# Altium PCB 433MHz_LNA.PcbDoc
Units mm, origin at the board's own origin, x right, y up, seen from the top; angles counter-clockwise.
Board outline 48.2 x 27.4 mm, 2 copper layers (Top Layer, Bottom Layer), stack 0.671 mm thick; 58 components, 24 nets, 176 pads, 495 vias.
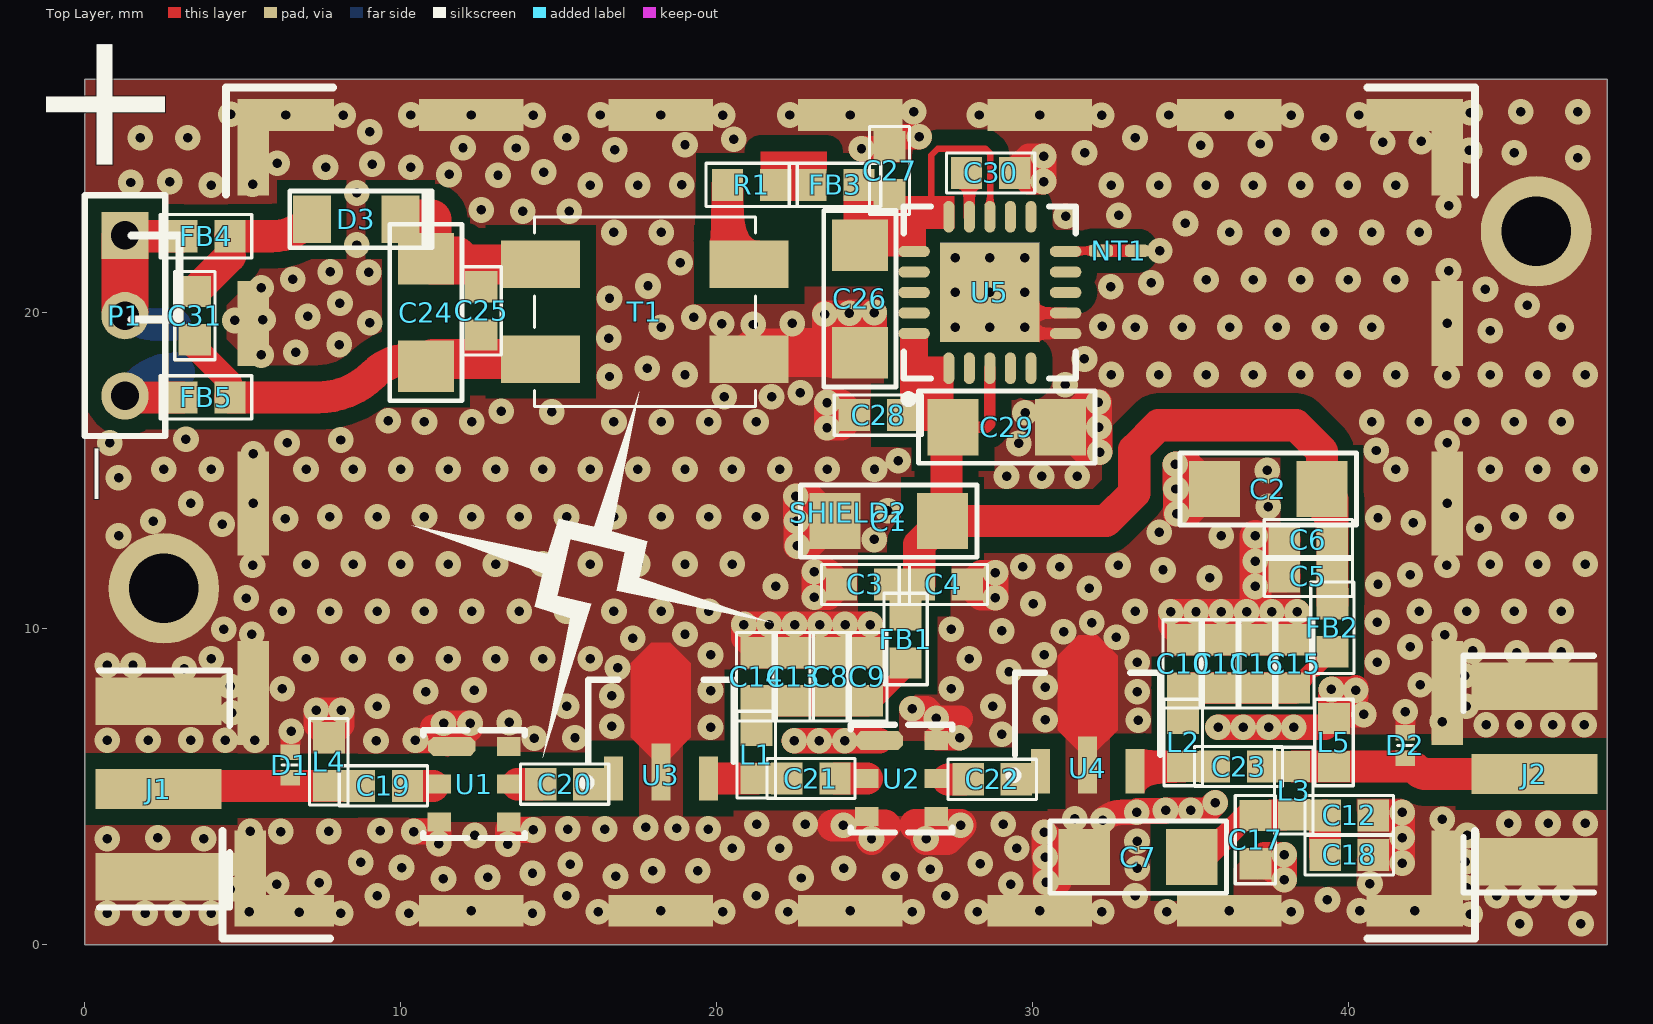
[diagram p0: Top Layer view]
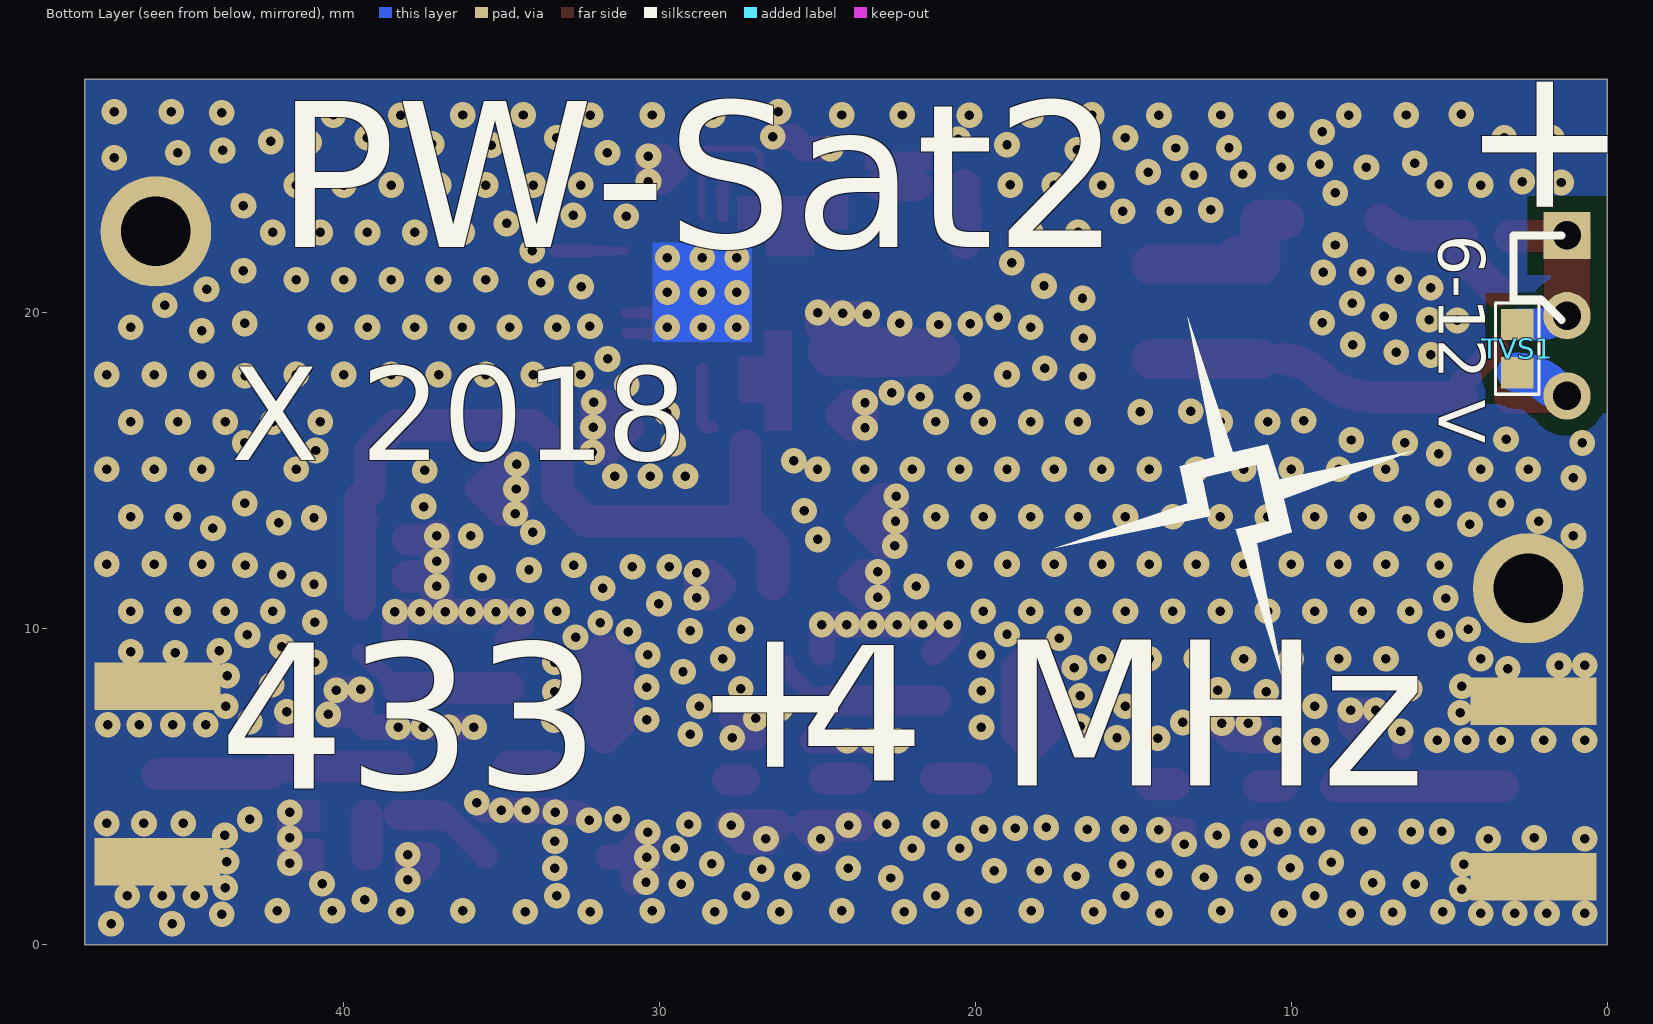
[diagram p1: Bottom Layer view, seen from below]
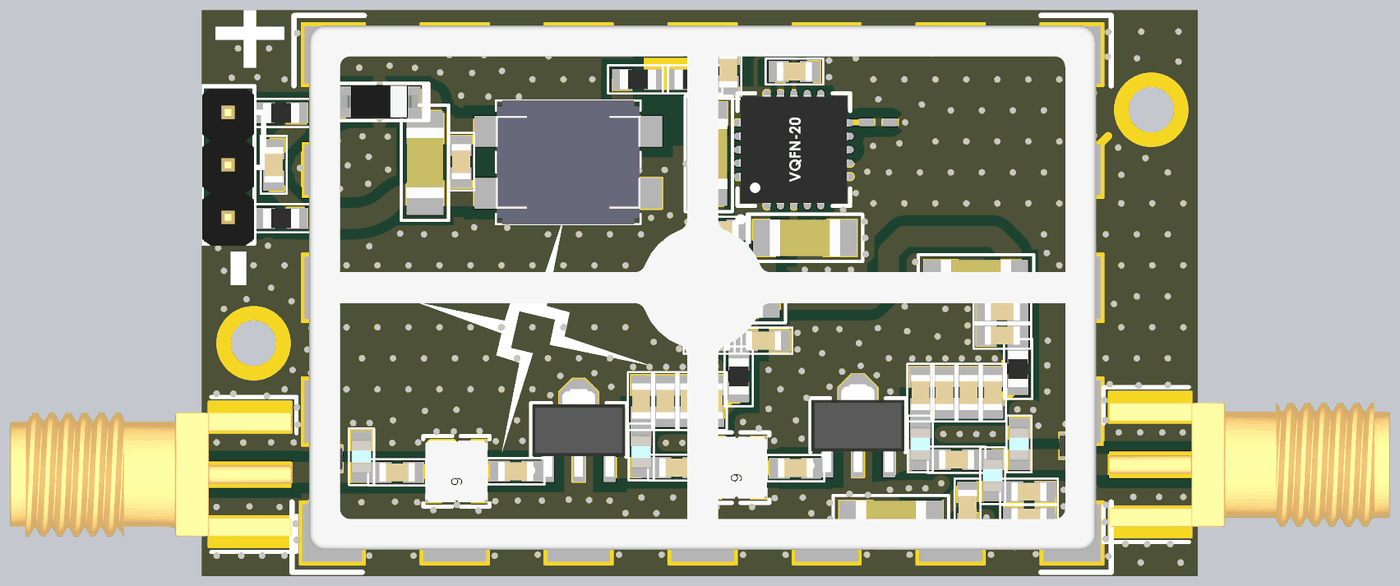
[diagram p2: 3D render of the assembled board from above, using the file's embedded part models]

## Layer stack, top to bottom
Top Solder: solder mask 0.0102, Solder Resist, Dk 3.5
Top Layer: signal copper 0.0356
Dielectric 1: core 0.6, FR-4, Dk 4.2
Bottom Layer: signal copper 0.0356
Bottom Solder: solder mask 0.0102, Solder Resist, Dk 3.5

## Board outline
0,0 0,27.4 48.2,27.4 48.2,0

## Design rules (kind name [scope] priority, off if disabled: settings)
AssemblyTestPointUsage [All] p1 off:
AssemblyTestpoint [All] p1 off: testpointundercomponent=TRUE minsize=1.016 maxsize=2.54 preferedsize=1.524 minholesize=0 maxholesize=1.016 preferedholesize=0.813 testpointgrid=0.025 usegrid=TRUE gridtolerance=0 allowsidetop=TRUE allowsidebottom=TRUE
Clearance [All] p1: gap=0.152 ignorepadtopadclearanceinfootprint=FALSE except(0.508: Arc-Poly Track-Poly SMDPad-Poly THPad-Poly Via-Poly Fill-Poly Poly-Poly Poly-Region Poly-Text Poly-Hole)
ComponentClearance R3_R4 [InComponent('R3') vs InComponent('R4')] p1: gap=0 collisioncheckmode=3 verticalgap=0 showdistances=FALSE
ComponentClearance R1_R2 [InComponent('R1') vs InComponent('R2')] p2: gap=0 collisioncheckmode=3 verticalgap=0 showdistances=FALSE
ComponentClearance ComponentClearance_PAD_08mm [HasFootprint('PAD_08mm')] p3: gap=0 collisioncheckmode=3 verticalgap=0 showdistances=FALSE
ComponentClearance ComponentClearance_1 [All vs InComponent('J4')] p4: gap=0 collisioncheckmode=3 verticalgap=0 showdistances=FALSE
ComponentClearance [All] p5: gap=0.254 collisioncheckmode=3 verticalgap=0.254 showdistances=FALSE
FabricationTestPointUsage [All] p1 off: valid=0 allowmultiple=FALSE
FabricationTestpoint [All] p1 off: side=3 testpointundercomponent=TRUE minsize=1.016 maxsize=2.54 preferedsize=1.524 minholesize=0 maxholesize=1.016 preferedholesize=0.813 testpointgrid=0.025 allowsidetop=TRUE allowsidebottom=TRUE usegrid=TRUE gridtolerance=0
HoleSize [All] p1: absolutevalues=TRUE maxlimit=4 minlimit=0.025 maxpercent=80.000 minpercent=20.000
Length "InNet('USBDP_CON') Or InNet('USBDM_CON')" [InNet('USBDP_CON') Or InNet('USBDM_CON')] p1: maxlimit=16.51 minlimit=13.97
MinimumSolderMaskSliver MSOP8_TSSOP8_3X3 [HasFootprint('MSOP8_TSSOP8_3X3')] p1: minsoldermaskwidth=0.076
MinimumSolderMaskSliver DFN8_3.0x2.0 [HasFootprint('DFN8_3.0x2.0')] p2: minsoldermaskwidth=0.076
MinimumSolderMaskSliver 6L2MM [HasFootprint('6L2MM')] p3: minsoldermaskwidth=0.076
MinimumSolderMaskSliver QFN16_3x3 [HasFootprint('QFN16_3x3')] p4: minsoldermaskwidth=0.076
MinimumSolderMaskSliver 0915LP15B026 [HasFootprint('0915LP15B026')] p5: minsoldermaskwidth=0.076
MinimumSolderMaskSliver PD0810J5050S2HF [HasFootprint('PD0810J5050S2HF')] p6: minsoldermaskwidth=0.076
MinimumSolderMaskSliver [All] p7: minsoldermaskwidth=0.152
PlaneClearance [All] p1: clearance=0.25
PlaneConnect PlaneConnect_via [All] p1: planeconnectstyle=Direct reliefexpansion=0.508 reliefentries=4 reliefconductorwidth=0.254 reliefairgap=0.254
PlaneConnect [All] p2: planeconnectstyle=Relief reliefexpansion=0.508 reliefentries=4 reliefconductorwidth=0.254 reliefairgap=0.254
PolygonConnect PolygonConnect_1 [HasFootprint('BMI-S-205-F')] p1: connectstyle=Direct reliefconductorwidth=0.254 reliefentries=4 polygonreliefangle="90 Angle" airgapwidth=0.254
PolygonConnect PolygonConnect_via [isVia] p2: connectstyle=Direct reliefconductorwidth=0.254 reliefentries=4 polygonreliefangle="90 Angle" airgapwidth=0.254
PolygonConnect [All] p3: connectstyle=Direct reliefconductorwidth=0.508 reliefentries=4 polygonreliefangle="90 Angle" airgapwidth=0.305
RoutingVias [All] p1: holewidth=0.15 width=0.55 viastyle="Through Hole" minholewidth=0.2 minwidth=0.6 maxholewidth=1 maxwidth=1.27
SilkToSilkClearance [All] p1: silktosilkclearance=0.025
SilkToSolderMaskClearance [IsPad] p1: minsilkscreentomaskgap=0 clearancetoexposedcopper=TRUE
SolderMaskExpansion [All] p1: expansion=0.051
Width Width_50ohm [InNetClass('50 ohm')] p1: maxlimit=1.016 minlimit=1.016 preferedwidth=1.016 bottomlayer_minwidth=0 bottomlayer_maxwidth=0 bottomlayer_prefwidth=0 minimp=40.000000 maximp=69.000000 favimp=50.000000
Width [All] p2: maxlimit=3 minlimit=0.15 preferedwidth=0.25
19 further rules are at their usual default settings.

## Classes and differential pairs
net class "50 ohm": NetC19_1 NetC19_2 NetC20_1 NetC20_2 NetC21_1 NetC21_2 NetC22_1 NetC22_2 NetC23_1 NetC23_2

## Components (designator, comment, footprint, x,y, rotation, side; value= is the part's Value field where it differs from the comment)
C1 "Ceramic X7R" C_1206_3216 25.454,13.409 r180 top value=10uF
C2 "Ceramic X7R" C_1206_3216 37.468,14.425 r180 top value=10uF
C3 "Ceramic X7R" C_0603_1608 24.717,11.402 r0 top value=1uF
C4 "Ceramic C0G" C_0603_1608 27.181,11.402 r0 top value=1nF
C5 "Ceramic X7R" C_0603_1608 38.738,11.656 r0 top value=1uF
C6 "Ceramic C0G" C_0603_1608 38.738,12.825 r180 top value=1nF
C7 "Ceramic X7R" C_1206_3216 33.35,2.769 r0 top value=10uF
C8 "Ceramic C0G" C_0603_1608 23.6,8.481 r270 top value=100pF
C9 "Ceramic X7R" C_0603_1608 24.768,8.481 r90 top value=1uF
C10 "Ceramic C0G" C_0603_1608 34.776,8.888 r270 top value=100pF
C11 "Ceramic X7R" C_0603_1608 35.944,8.888 r90 top value=1uF
C12 "Ceramic X7R" C_0603_1608 40.034,4.087 r0 top value=1uF
C13 "Ceramic C0G" C_0603_1608 22.431,8.481 r270 top value=1nF
C14 "Ceramic X7R" C_0603_1608 21.263,8.481 r90 top value=100nF
C15 "Ceramic C0G" C_0603_1608 38.281,8.888 r270 top value=1nF
C16 "Ceramic X7R" C_0603_1608 37.113,8.888 r90 top value=100nF
C17 "Ceramic C0G" C_0603_1608 37.062,3.325 r90 top value=1nF
C18 "Ceramic X7R" C_0603_1608 40.034,2.843 r0 top value=100nF
C19 "Ceramic C0G" C_0603_1608 9.452,5.027 r0 top value=100pF
C20 "Ceramic C0G" C_0603_1608 15.192,5.078 r0 top value=100pF
C21 "Ceramic C0G" C_0603_1608 22.99,5.256 r0 top value=100pF
C22 "Ceramic C0G" C_0603_1608 28.731,5.233 r0 top value=100pF
C23 "Ceramic C0G" C_0603_1608 36.528,5.637 r0 top value=100pF
C24 "Ceramic X7R" C_1206_3216 10.798,20.013 r270 top value=10uF
C25 "Ceramic X7R" C_0603_1608 12.551,20.064 r270 top value=100nF
C26 "Ceramic X7R" C_1206_3216 24.54,20.445 r270 top value=10uF
C27 "Ceramic X7R" C_0603_1608 25.479,24.509 r90 top value=100nF
C28 "Ceramic X7R" C_0603_1608 25.124,16.762 r180 top value=100nF
C29 "Ceramic X7R" C_1206_3216 29.188,16.381 r0 top value=10uF
C30 "Ceramic X7R" C_0603_1608 28.68,24.433 r0 top value=1uF
C31 "Ceramic C0G" C_0603_1608 3.48,19.914 r270 top value=100pF
D1 "ESD Suppressors / TVS Diodes" D_BI_0402_1005 6.506,5.683 r90 top value=PS04LTVA1
D2 "ESD Suppressors / TVS Diodes" D_BI_0402_1005 41.812,6.305 r90 top value=PS04LTVA1
D3 "1N4148W" SOD123 8.588,22.962 r180 top value=LL4148
FB1 "Ferrite bead" FB_0603_1608 25.987,9.675 r270 top value=BLM18AG601SN1
FB2 "Ferrite bead" FB_0603_1608 39.5,10.031 r270 top value=BLM18AG601SN1
FB3 "Ferrite bead" FB_0603_1608 23.752,24.052 r0 top value=BLM18AG601SN1
FB4 "Ferrite bead" FB_0603_1608 3.835,22.428 r0 top value=BLM18AG601SN1
FB5 "Ferrite bead" FB_0603_1608 3.835,17.323 r180 top value=BLM18AG601SN1
J1 "SMA EDGE" J_SMA_EDGE_6.25 0.333,4.925 r0 top value=RF2-143-T-17-50-G
J2 "SMA EDGE" J_SMA_EDGE_6.25 47.9,5.4 r180 top value=RF2-143-T-17-50-G
L1 "L" L_0603_1608 21.263,6.018 r90 top value=NC
L2 "L" L_0603_1608 34.776,6.399 r90 top value=NC
L3 "L" L_0603_1608 38.281,4.875 r270 top value=NC
L4 "Inductor" L_0603_1608 7.725,5.789 r270 top value=100nH
L5 "Inductor" L_0603_1608 39.551,6.399 r270 top value=100nH
NT1 "NETTIE 15MIL" NT_15MIL 32.744,21.969 r180 top net-tie value=NT_15MIL
P1 "Goldpin" P_HEADER_1x3_2.54 1.27,22.454 r270 top value=DS1021-1*3SF1-1
R1 "Resistor" R_0603_1608 21.111,24.052 r0 top value=0R
SHIELD1 "EMI Shield Cover" BMI-S-205-C 50.19,80.061 r180 top value=BMI-S-205-C
SHIELD2 "EMI Shield" BMI-S-205-F 24.237,13.968 r0 top locked value=BMI-S-205-F
T1 "Common mode filter" ACM7060 17.732,20.038 r0 top value=ACM7060-301-2PL-TL
TVS1 "0603ESDA2" R_0603_1608 2.845,18.872 r270 bottom value=0603ESDA2-TR2
U1 "TA0649A" SAW_DCC6_SM3030-6_3x3 12.322,5.078 r270 top
U2 "TA0649A" SAW_DCC6_SM3030-6_3x3 25.86,5.256 r270 top
U3 "PGA103+" SOT89_TO-243AA_N 18.24,7.06 r0 top value=PGA-103+
U4 "PGA103+" SOT89_TO-243AA_N 31.753,7.287 r0 top value=PGA-103+
U5 "TPS7A4701RGWR" QFN20_5x5 28.654,20.648 r90 top

## Footprints (in the part's own frame and the unit in brackets; to place one, negate y for a bottom-side part, rotate by r counter-clockwise, add the part's x,y. Pads: shape width x height; smd on the part's side, far side on the other; paste and mask are expansions set on the pad)
ACM7060 [mm] "TDK Common Mode Filters ACM7060 Series"
  rect 2.5x1.5 smd: 1(-3.3,1.5) 2(-3.3,-1.5) 3(3.3,-1.5) 4(3.3,1.5)
  silkscreen extent -3.5,-3 3.5,3, body extent -3.5,-3 3.5,3, height 3.5
BMI-S-205-C [mm]
  body extent -19.28,-12.93 19.28,12.93, height 6.5
BMI-S-205-F [mm]
  rect 1x3.05 smd paste-0.127: 1(-19,-11.875) 1(-18.9,11.275) 1(18.9,-11.875) 1(18.9,11.275)
  rect 1x3.3 smd paste-0.127: 1(-18.9,-6) 1(-18.9,0) 1(18.9,-6) 1(18.9,0)
  rect 1x2.7 smd paste-0.127: 1(-18.9,5.7) 1(18.9,5.7)
  rect 3.15x1 smd paste-0.127: 1(-17.925,-12.9)
  rect 3.05x1 smd paste-0.127: 1(-17.875,12.3) 1(17.875,-12.9) 1(17.875,12.3)
  rect 3.3x1 smd paste-0.127: 1(-12,-12.9) 1(-12,12.3) 1(-6,-12.9) 1(-6,12.3) 1(0,-12.9) 1(0,12.3) 1(6,-12.9) 1(6,12.3) 1(12,-12.9) 1(12,12.3)
  silkscreen extent -19.87,-13.78 19.77,13.18, body extent -19.05,-12.7 19.05,12.7, height 6
C_0603_1608 [mil]
  rect 39x40 smd: 1(-30,0) 2(30,0)
  silkscreen extent -55,-25 55,25, body extent -33,-18 33,18, height 35
C_1206_3216 [mil]
  rect 64x70 smd: 1(-67,0) 2(67,0)
  silkscreen extent -110,-45 110,45, body extent -67,-35 67,35, height 39
D_BI_0402_1005 [mm]
  rect 0.49x0.62 smd: 1(-0.405,0) 2(0.405,0)
  silkscreen extent 0,-0.25 0,0.25, body extent -0.5,-0.3 0.5,0.3, height 0.48
FB_0603_1608 [mil]
  rect 39x40 smd: 1(-30,0) 2(30,0)
  silkscreen extent -57,-27 57,27, body extent -34,-19 34,19, height 21
J_SMA_EDGE_6.25 [mm]
  rect 4x1.27 smd paste-5: 1(2,0)
  rect 4x1.5 smd paste-5: 2(2,-2.775) 2(2,2.775)
  rect 4x1.5 smd far side paste-5: 2(2,-2.775) 2(2,2.775)
  silkscreen extent 0.13,-3.75 4.25,3.75, body extent -9.6,-3 4,3, height 3.5
L_0603_1608 [mil]
  rect 39x40 smd: 1(-30,0) 2(30,0)
  silkscreen extent -54,-24 54,24, body extent -31,-20 32,20, height 31
NT_15MIL [mil]
  rrect50% 30x15 smd: 1(-22.5,0) 2(22.5,0)
  Top Layer lines w15: 22.5,0 -22.5,0
P_HEADER_1x3_2.54 [mm] "Connector; Header; 3 Position, Male"
  rect 1.5x1.5 hole 0.9: 1(0,0)
  round 1.5 hole 0.9: 2(2.54,0) 3(5.08,0)
  silkscreen extent -1.27,-1.27 6.35,1.27, body extent -1.17,-1.25 6.45,1.25, height 8.2
QFN20_5x5 [mm] "QFN, 20-Leads, Body 5,00x5,00mm, Pitch 0,65mm, Thermal Pad 3,15x3,15mm, IPC Medium Density"
  oval 1x0.35 smd: 1(-2.4,1.3) 2(-2.4,0.65) 3(-2.4,0) 4(-2.4,-0.65) 5(-2.4,-1.3) 11(2.4,-1.3) 12(2.4,-0.65) 13(2.4,0) 14(2.4,0.65) 15(2.4,1.3)
  oval 0.35x1 smd: 6(-1.3,-2.4) 7(-0.65,-2.4) 8(0,-2.4) 9(0.65,-2.4) 10(1.3,-2.4) 16(1.3,2.4) 17(0.65,2.4) 18(0,2.4) 19(-0.65,2.4) 20(-1.3,2.4)
  rect 3.15x3.15 smd paste-5: 21(0,0)
  Bottom Layer region: -1.575,-1.575 1.575,-1.575 1.575,1.575 -1.575,1.575
  silkscreen extent -3.5,-2.72 2.73,2.73, body extent -2.62,-2.62 2.63,2.63, height 1.05
R_0603_1608 [mil]
  rect 39x40 smd: 1(-30,0) 2(30,0)
  silkscreen extent -57,-27 57,27, body extent -34,-19 34,19, height 21
SAW_DCC6_SM3030-6_3x3 [mm]
  oct 0.6x1.5 smd: 1(-1.2,-0.7)
  rect 0.6x0.75 smd: 2(0,-1.1) 3(1.2,-1.1) 4(1.2,1.1) 5(0,1.1) 6(-1.2,1.1)
  silkscreen extent -1.71,-1.61 1.71,1.61, body extent -1.5,-1.5 1.5,1.5, height 1.14
SOD123 [mm]
  rect 1.2x1.5 smd: 1(-1.4,0) 2(1.4,0)
  silkscreen extent -2.4,-0.9 2.1,0.9, body extent -1.86,-0.81 1.84,0.79, height 1.27
SOT89_TO-243AA_N [mm] "SOT89, 3-Leads, Body 4,50x2,45mm, Pitch 1,50mm, Lead Span 4,1mm, IPC Medium Density"
  rect 0.6x1.4 smd: 1(-1.5,-1.8) 3(1.5,-1.8)
  rect 0.6x1.8 smd: 2(0,-1.6)
  Top Layer region: -0.228,-1.219 -0.95,-0.498 -0.95,1.85 -0.3,2.5 0.3,2.5 0.95,1.85 0.95,-0.498 0.229,-1.219
  silkscreen extent -2.47,-2.05 2.3,1.32, body extent -2.25,-2.25 2.25,3.05, height 1.59

## Part data
C1 C2 C7 C24 C26 C29: library part C_10uF_25V_X7R_1206_10, "Capacitor", Dielectric=X7R, Manufacturer="Samsung Electro-Mechanics", Manufacturer Part Number=CL31B106KAHNNNE, Tolerance (%)=10, Voltage=25V, HelpURL=http://www.tme.eu/pl/Document/4a42202b32dab16128fe107dd69598cc/samsung-chip-cap.pdf, Part Number=C_10uF_25V_X7R_1206_10, SCH_Footprint=1206, Supplier 1=TME, Supplier 2="RS Components", Supplier 3=Farnell, Supplier 4=Mouser, Supplier 5=Digi-Key, Supplier Part Number 1=CL31B106KAHNNNE
C3 C5 C9 C11 C12 C30: library part C_1uF_25V_X7R_0603_10, "Capacitor", Dielectric=X7R, Manufacturer=Samsung, Manufacturer Part Number=CL10B105KA8NNNC, Tolerance (%)=10, Voltage=25V, HelpURL=http://www.tme.eu/pl/Document/4a42202b32dab16128fe107dd69598cc/samsung-chip-cap.pdf, Part Number=C_1uF_25V_X7R_0603_10, SCH_Footprint=0603, Supplier 1=TME, Supplier 2="RS Components", Supplier 3=Farnell, Supplier 4=Mouser, Supplier 5=Digi-Key, Supplier Part Number 1=CL10B105KA8NNNC
C4 C6 C13 C15 C17: library part C_1nF_50V_C0G_0603_5, "Capacitor", Dielectric=C0G, Manufacturer=Samsung, Manufacturer Part Number=CL10C102JB8NNNC, Tolerance (%)=5, Voltage=50V, HelpURL=http://www.tme.eu/pl/Document/7da762c1dbaf553c64ad9c40d3603826/mlcc_samsung.pdf, Part Number=C_1nF_50V_C0G_0603_5, SCH_Footprint=0603, Supplier 1=TME, Supplier 2="RS Components", Supplier 3=Farnell, Supplier 4=Mouser, Supplier 5=Digi-Key, Supplier Part Number 1=CL10C102JB8NNNC
C8 C10 C19 C20 C21 C22 C23 C31: library part C_100pF_50V_C0G_0603_5, "Capacitor", Dielectric=C0G, Manufacturer=AVX, Manufacturer Part Number=06035A101JAT2A, Tolerance (%)=5, Voltage=50V, HelpURL=http://www.tme.eu/pl/Document/28556c2a4dfa60995042b7f5f1edb9ed/AVX-C0G.pdf, Part Number=C_100pF_50V_C0G_0603_5, SCH_Footprint=0603, Supplier 1=TME, Supplier 2="RS Components", Supplier 3=Farnell, Supplier 4=Mouser, Supplier 5=Digi-Key, Supplier Part Number 1=06035A101JAT2A
C14 C16 C18 C25 C27 C28: library part C_100nF_50V_X7R_0603_5, "Capacitor", Dielectric=X7R, Manufacturer=Samsung, Manufacturer Part Number=CL10B104JB8NNNC, Tolerance (%)=5, Voltage=50V, HelpURL=http://www.tme.eu/pl/Document/4a42202b32dab16128fe107dd69598cc/samsung-chip-cap.pdf, Part Number=C_100nF_50V_X7R_0603_5, SCH_Footprint=0603, Supplier 1=TME, Supplier 2="RS Components", Supplier 3=Farnell, Supplier 4=Mouser, Supplier 5=Digi-Key, Supplier Part Number 1=CL10B104JB8NNNC
D1 D2: library part TVS_PS04LTVA1, Manufacturer=Bussmann, Manufacturer Part Number=PS04LTVA1, Voltage=12V, HelpURL=https://pl.mouser.com/datasheet/2/87/31fc02c3-c2a7-4757-9ba5-5a4597d899a4-33212.pdf, Part Number=TVS_PS04LTVA1, SCH_Footprint=0402, Supplier 1=TME, Supplier 2="RS Components", Supplier 3=Farnell, Supplier 4=Mouser, Supplier 5=Digi-Key, Supplier Part Number 4=504-PS04LTVA1
D3: library part D_1N4148W_0A15_75V_SOD123, Current=0A15, Manufacturer="Fairchild Semiconductor", Manufacturer Part Number=LL4148, Voltage=75V, Part Number=D_1N4148W_0A15_75V_SOD123, SCH_Footprint=SOD123, Supplier 1=TME, Supplier 2="RS Components", Supplier 3=Farnell, Supplier 4=Mouser, Supplier 5=Digi-Key, Supplier Part Number 4=771-PMLL4148L-T/R, Supplier Part Number 5=LL4148FSCT
FB1 FB2 FB3 FB4 FB5: library part FB_BLM18AG601SN1, "Ferrite Bead", Current=0A5, Manufacturer=Murata, Manufacturer Part Number=BLM18AG601SN1D, Resistance=600R, HelpURL=http://datasheet.octopart.com/BLM18AG601SN1D-Murata-datasheet-11743096.pdf, Part Number=FB_BLM18AG601SN1, SCH_Footprint=0603, Supplier 1=TME, Supplier 2="RS Components", Supplier 3=Farnell, Supplier 4=Mouser, Supplier 5=Digi-Key, Supplier Part Number 2=7241299P, Supplier Part Number 3=1515679, Supplier Part Number 4=81-BLM11A601S, Supplier Part Number 5=490-1014-1-ND
J1 J2: library part J_SMA_EDGE_6.25, "SMA connector", Manufacturer="Adam Tech", Manufacturer Part Number=RF2-143-T-17-50-G, Component Type=Standard, HelpURL=http://www.tme.eu/pl/Document/5895dbb620da9c3499391e7670c4adea/RF2-143-T-17-50-G.pdf, Part Number=J_SMA_EDGE_6.25, SCH_Footprint="SMA EDGE", Supplier 1=TME, Supplier 2="RS Components", Supplier 3=Farnell, Supplier 4=Mouser, Supplier 5=Digi-Key, Supplier Part Number 1=RF2-143-T-17-50-G
L1 L2 L3: library part L_0603, "Induction", Part Number=L_0603, SCH_Footprint=0603, Supplier 1=TME, Supplier 2="RS Components", Supplier 3=Farnell, Supplier 4=Mouser, Supplier 5=Digi-Key
L4 L5: library part L_100NH_0A3_0603, "Induction", Current=0A3, Manufacturer=Bourns, Manufacturer Part Number=CI160808-R10J, Resistance=1R7, HelpURL=https://datasheet.octopart.com/CI160808-8N2J-Bourns-datasheet-2719.pdf, Part Number=L_100NH_0A3_0603, SCH_Footprint=0603, Supplier 1=TME, Supplier 2="RS Components", Supplier 3=Farnell, Supplier 4=Mouser, Supplier 5=Digi-Key
NT1: library part NT_15MIL, Component Type="Net Tie (No BOM)", Part Number=NT_15MIL, SCH_Footprint=SMD, Supplier 1=TME, Supplier 2="RS Components", Supplier 3=Farnell, Supplier 4=Mouser, Supplier 5=Digi-Key
P1: library part P_HEADER_1x3_2.54, "Header, 3-Pin", Manufacturer=Connfly, Manufacturer Part Number=DS1021-1*3SF1-1, Supplier Part Number 1=ZL201-03G, Component Type=Standard, HelpURL=http://www.tme.eu/en/Document/cc301e58a5da78cb543a94b5a5b7f06a/DS1021.pdf, Part Number=P_HEADER_1x3_2.54, SCH_Footprint="1x3 2.54mm", Supplier 1=TME, Supplier 2="RS Components", Supplier 3=Farnell, Supplier 4=Mouser, Supplier 5=Digi-Key
R1: library part R_0R_0603, Manufacturer Part Number=RC1608J000CS, Part Number=R_0R_0603, SCH_Footprint=0603, Supplier 1=TME, Supplier 2="RS Components", Supplier 3=Farnell, Supplier 4=Mouser, Supplier 5=Digi-Key, Supplier Part Number 5=1276-3510-1-ND
SHIELD1: library part SHIELD_BMI-S-205-C, "Shield, 1 pad", Manufacturer=Laird, Manufacturer Part Number=BMI-S-205-C, HelpURL=https://assets.lairdtech.com/home/brandworld/files/Board%20Level%20Shields%20Catalog%20Download.pdf, Part Number=SHIELD_BMI-S-205-C, SCH_Footprint=38.1x25.4mm, Supplier 1=TME, Supplier 2="RS Components", Supplier 3=Farnell, Supplier 4=Mouser, Supplier 5=Digi-Key, Supplier Part Number 3=2497722, Supplier Part Number 4=739-BMIS-205-C, Supplier Part Number 5=903-1017-ND
SHIELD2: library part SHIELD_BMI-S-205-F, "Shield, 1 pad", Manufacturer=Laird, Manufacturer Part Number=BMI-S-205-F, HelpURL=https://assets.lairdtech.com/home/brandworld/files/Board%20Level%20Shields%20Catalog%20Download.pdf, Part Number=SHIELD_BMI-S-205-F, SCH_Footprint=38.1x25.4mm, Supplier 1=TME, Supplier 2="RS Components", Supplier 3=Farnell, Supplier 4=Mouser, Supplier 5=Digi-Key, Supplier Part Number 3=2497723, Supplier Part Number 4=739-BMIS-205-F, Supplier Part Number 5=903-1054-1-ND
T1: library part ACM7060-301-2PL-TL, "TDK ACM7060 common mode filter", Current=5, Manufacturer=TDK, Resistance=0.01R, Voltage=80, HelpURL=https://pl.mouser.com/datasheet/2/400/mf_commercial_power_acm7060_en-837183.pdf, Manufacturer Part Number=ACM7060-301-2PL-TL, Part Number=ACM7060-301-2PL-TL, SCH_Footprint=ACM7060, Supplier 1=TME, Supplier 2="RS Components", Supplier 3=Farnell, Supplier 4=Mouser, Supplier 5=Digi-Key, Supplier Part Number 3=1503723, Supplier Part Number 4=810-ACM70603012PLTL, Supplier Part Number 5=445-2214-1-ND
TVS1: library part TVS_0603ESDA2, Current=30A, Manufacturer=Bussmann, Manufacturer Part Number=0603ESDA2-TR2, Voltage=14V, HelpURL=http://www.cooperindustries.com/content/dam/public/bussmann/Electronics/Resources/product-datasheets/bus-elx-ds-4419-0603esda2-tr2.pdf, Part Number=TVS_0603ESDA2, SCH_Footprint=0603, Supplier 1=TME, Supplier 2="RS Components", Supplier 3=Farnell, Supplier 4=Mouser, Supplier 5=Digi-Key, Supplier Part Number 1=0603ESDA2-TR2, Supplier Part Number 4=504-0603ESDA2-TR2, Supplier Part Number 5=283-4156-1-ND
U1 U2: library part U_TA0649A, Center Frequency (MHz)=433.92, Manufacturer=Tai-Saw, Max Power (dBm)=10, Bandwidth (MHz)=8, HelpURL=https://www.golledge.com/media/2065/ma09182.pdf, Manufacturer Part Number=TA0649A, Part Number=U_TA0649A, SCH_Footprint=SM3030, Supplier 1=TME, Supplier 2="RS Components", Supplier 3=Farnell, Supplier 4=Mouser, Supplier 5=Digi-Key
U3 U4: library part U_PGA103+, Manufacturer=Mini-Circuits, Manufacturer Part Number=PGA-103+, HelpURL=https://ww2.minicircuits.com/pdfs/PGA-103+.pdf, Part Number=U_PGA103+, SCH_Footprint=SOT89, Supplier 1=TME, Supplier 2="RS Components", Supplier 3=Farnell, Supplier 4=Mouser, Supplier 5=Digi-Key
U5: library part VL_TPS7A4701RGWR_ADJ_1A, "RF LDO Voltage Regulator", Current=1A, Manufacturer="Texas Instruments", Voltage=ADJ, HelpURL=http://www.ti.com/lit/ds/symlink/tps7a47.pdf, Manufacturer Part Number=TPS7A4701RGWR, Part Number=VL_TPS7A4701RGWR_ADJ_1A, SCH_Footprint=VQFN20, Supplier 1=TME, Supplier 2="RS Components", Supplier 3=Farnell, Supplier 4=Mouser, Supplier 5=Digi-Key, Supplier Part Number 3=2542798, Supplier Part Number 4=595-TPS7A4701RGWR, Supplier Part Number 5=296-37224-1-ND

## Free pads (board coordinates)
  round 3.5 hole 2.2: 7(2.502,11.278) 7(45.949,22.581)

## Via types
v1: diameter 0.813, hole 0.3, Top Layer to Bottom Layer, tented both sides, 486 vias
v2: diameter 0.8, hole 0.3, Top Layer to Bottom Layer, tented bottom, 9 vias

## Nets (pads, with @x,y where several pads share a name; then routed paths per layer and width w, separated by ;. In a path a pad name is that pad's centre, name@x,y a point inside that pad or via, vN(x,y) a via of type N, cw(c..) or ccw(c..) an arc to the next point about the centre after c; other vN are vias at no path point)
+5V: C1.1 C2.1 C3.2 C4.1 C5.2 C6.1 C28.1 C29.1 FB1.1 FB2.1 U5.1 U5.3 U5.20 | length 26.1
  Top Layer w0.356: 28.299,16.381 28.553,16.381 28.654,16.482 U5.3
  Top Layer w1.016: C4.1 26.419,12.672 C1.1 32.337,13.409 33.226,14.298 33.226,15.67 34,16.443 38.346,16.443 39.17,15.619 C2.1 39.5,14.095 C6.1 C5.2 FB2.1 ; C1.1@27.283,13.536 C29.1@27.283,15.797
GND: C1.2 C2.2 C3.1 C4.2 C5.1 C6.2 C7.1 C8.1 C9.2 C10.1 C11.2 C12.2 C13.1 C14.2 C15.1 C16.2 C17.1 C18.2 C26.2 C27.2 C28.2 C29.2 C30.2 D1.2 D2.2 J1.2 J2.2 L4.1 L5.1 NT1.1 pad.7 SHIELD2.1 T1.3 U1.1 U1.3 U1.4 U1.6 U2.1 U2.3 U2.4 U2.6 U3.2 U4.2 U5.6 U5.7 U5.21 | length 102.5
  Top Layer w0.356: U5.21@29.304,19.998 U5.7 ; U5.21@29.954,19.348 U5.6
  Top Layer w0.61: D1.2@6.506,6.172 v1@6.506,6.724 ; D2.2@41.812,6.787 v1(41.812,7.371)
  Top Layer w0.813: v1(10.417,3.579) 10.824,3.579 ; v1(10.468,6.475) 11.425,6.475 v1@11.017,6.883 ; v1(11.205,3.198) v1@11.205,3.554 ; v1(11.357,7.008) v1(12.195,7.008) 12.195,6.83 U1.1@11.865,6.5 ; v1(13.389,3.173) U1.4@13.389,3.63 ; U1.4@13.67,3.63 v1(14.202,3.63) ; C14.2@21.327,9.243 20.87,9.701 v1(20.87,10.132) v1(21.67,10.132) v1(22.47,10.132) v1(23.27,10.132) v1(24.07,10.132) v1(24.87,10.132) 24.87,9.281 C9.2@24.832,9.243 ; v1(22.457,6.456) v1(23.257,6.456) v1(24.057,6.456) U2.1 ; v1@22.533,12.622 v1(22.533,13.409) ; v1(22.558,12.622) C1.2@22.965,12.622 ; v1(23.422,19.962) 23.422,19.556 ; v1@23.422,19.988 v1(24.209,19.988) ; v1(24.59,25.195) 25.403,25.195 C27.2 25.784,25.576 v1(26.419,25.576) ; v1(26.191,7.465) 26.648,7.465 v1(26.953,7.161) 27.708,7.161 ; U2.6@26.98,6.551 v1(27.702,6.551) ; v1@30.407,1.979 v1(30.407,2.766) ; v1(30.432,1.979) 30.839,1.979 30.839,2.335 v1(30.407,2.766) ; C7.1@31.626,2.766 31.169,2.766 v1(30.382,3.554) 30.382,2.792 v1(30.407,2.766) ; v1(32.083,17.168) C29.2@31.677,17.168 ; v1@32.109,17.168 v1(32.109,16.381) ; v1(32.237,3.937) cw(c32.844,3.329) 32.844,4.189 v1(33.303,4.189) 33.303,4.214 33.317,4.229 34.189,4.229 v1(34.217,4.256) v1(35.017,4.256) 35.554,4.256 v1(35.792,4.494) ; v1@34.547,13.638 v1(34.547,14.425) ; v1(34.573,13.638) C2.2@34.979,13.638 ; C10.1@34.84,9.65 34.383,10.107 v1(34.383,10.539) v1(35.183,10.539) v1(35.983,10.539) v1(36.783,10.539) v1(37.583,10.539) v1(38.383,10.539) 38.383,9.687 C15.1@38.345,9.65 ; v1(35.881,6.881) v1(36.681,6.881) v1(37.481,6.881) v1(38.281,6.881) 39.272,6.881 L5.1@39.472,7.081 ; L5.1 L5.1@39.472,7.081 ; v1@40.237,7.846 39.678,7.288 v1(40.491,7.288) ; v1@40.237,8.126 40.188,8.077 v1(39.472,8.077) L5.1@39.472,7.081 ; v1(41.71,2.582) v1(41.71,3.382) v1(41.71,4.182) ; v1(22.508,14.196) 22.965,14.196 C1.2 ; v1(22.508,14.196) 23.295,13.409 C1.2 ; v1(22.508,14.196) 22.508,13.434 v1(22.533,13.409) ; v1(22.533,13.409) 22.965,12.977 C1.2@22.965,12.622 ; C1.2@22.965,12.622 C1.2 ; 23.422,19.556 23.778,19.556 v1(24.209,19.988) ; 23.422,19.556 C26.2@24.209,18.768 ; C26.2@24.209,18.768 24.997,19.556 v1(24.997,20.013) ; C26.2@24.209,18.768 24.209,19.226 v1(24.997,20.013) ; v1(24.209,19.988) 24.235,20.013 v1(24.997,20.013) ; C29.2 31.347,16.381 v1(32.134,15.593) ; C29.2 31.677,15.593 v1(32.134,15.593) ; C29.2 C29.2@31.677,17.168 ; C29.2@31.677,17.168 31.677,16.813 v1(32.109,16.381) ; v1(32.109,16.381) 32.134,16.355 v1(32.134,15.593) ; v1(34.522,15.212) 34.979,15.212 C2.2 ; v1(34.522,15.212) 35.309,14.425 C2.2 ; v1(34.522,15.212) 34.522,14.45 v1(34.547,14.425) ; v1(34.547,14.425) 34.979,13.993 C2.2@34.979,13.638 ; C2.2@34.979,13.638 C2.2 ; L4.1@7.325,6.951 v1(7.325,7.415) v1(8.125,7.415) 8.125,6.951 L4.1 L4.1@7.325,6.951 ; v1(23.092,11.002) v1(23.092,11.802) 23.555,11.802 C3.1 23.555,11.002 v1(23.092,11.002) ; v1(23.498,16.362) 23.962,16.362 C28.2 23.962,17.162 v1(23.498,17.162) v1(23.498,16.362) ; C4.2@27.969,11.377 28.369,11.777 v1(28.832,11.777) v1(28.832,10.977) 28.369,10.977 C4.2@27.969,11.377 ; C30.2@29.493,24.56 29.893,24.16 v1(30.356,24.16) v1(30.356,24.96) 29.893,24.96 C30.2@29.493,24.56 ; C17.1@37.341,2.69 v1(37.976,2.055) v1(37.976,2.843) 37.341,2.843 C17.1@37.341,2.69
  Top Layer w1.016: v1@23.689,3.77 25.327,3.77 v1(24.908,3.351) ; 26.3,3.782 v1(27.727,3.782) 27.295,3.351 v1(26.635,3.351) ; v1(37.062,12.939) v1(37.062,12.139) v1(37.062,11.339) 37.062,10.767 v1@37.113,10.717 ; v1@37.176,12.825 C6.2 ; v1@37.214,11.656 C5.1
  Top Layer w1.524: T1.3@21.237,18.743 C26.2
  other v1: 45.441,0.66 47.371,0.66 43.866,0.965 0.711,0.991 1.905,0.991 2.921,0.991 4.002,0.991 8.103,0.991 10.249,0.991 14.173,0.991 6.782,1.016 5.207,1.041 16.256,1.041 20.193,1.041 22.256,1.041 26.193,1.041 28.256,1.041 32.193,1.041 34.256,1.041 38.193,1.041 12.237,1.068 18.237,1.068 24.237,1.068 30.237,1.068 36.237,1.068 40.361,1.067 42.112,1.068 39.345,1.422 9.252,1.549 15.252,1.549 21.252,1.549 27.252,1.549 33.252,1.549 44.704,1.549 45.745,1.549 46.863,1.549 4.597,1.753 43.752,1.803 6.071,1.905 29.314,1.905 40.691,1.93 7.417,1.956 11.354,2.083 22.682,2.108 12.751,2.134 16.803,2.159 25.654,2.159 14.173,2.261 17.983,2.337 19.406,2.337 26.772,2.384 24.028,2.413 33.317,2.413 10.028,2.438 4.547,2.54 15.367,2.54 28.355,2.557 8.738,2.6 43.713,2.625 20.502,3.049 22.002,3.049 29.502,3.049 33.315,3.277 0.711,3.351 3.759,3.353 2.306,3.378 12.344,3.454 43.764,3.454 5.237,3.581 6.198,3.579 7.725,3.581 9.347,3.607 15.291,3.658 16.459,3.658 19.736,3.658 18.745,3.683 17.755,3.708 24.019,3.782 21.278,3.81 22.809,3.81 29.083,3.81 45.085,3.835 46.33,3.835 47.502,3.835 42.977,3.962 31.347,3.988 9.22,6.452 0.711,6.475 2.007,6.468 3.353,6.477 4.445,6.475 5.385,6.468 14.227,6.536 15.519,6.551 29.032,6.661 6.531,6.75 19.812,6.883 16.688,6.909 44.374,6.96 45.415,6.96 46.482,6.96 47.473,6.96 13.44,7.034 42.977,7.061 30.407,7.123 33.35,7.101 4.648,7.341 9.252,7.549 15.252,7.549 28.752,7.549 43.739,7.544 16.688,7.874 10.798,8.001 33.325,8.001 12.322,8.059 19.812,8.044 40.237,8.05 6.252,8.103 27.432,8.103 30.404,8.153 4.597,8.179 42.278,8.23 43.688,8.509 29.261,8.636 3.15,8.731 16.866,8.763 0.711,8.839 1.524,8.839 33.325,8.941 40.919,8.941 4.002,9.049 7.002,9.049 8.502,9.049 10.002,9.049 11.502,9.049 13.002,9.049 14.502,9.049 16.002,9.049 28.002,9.049 19.812,9.169 30.378,9.169 45.339,9.243 46.752,9.269 43.942,9.296 41.961,9.423 17.348,9.701 32.664,9.728 43.053,9.804 5.283,9.83 19.002,9.83 30.988,9.906 29.032,9.931 4.394,9.982 27.432,9.982 31.887,10.185 40.919,10.211 6.252,10.549 7.752,10.549 9.252,10.549 10.752,10.549 12.252,10.549 13.752,10.549 15.252,10.549 16.752,10.549 18.252,10.549 19.752,10.549 33.252,10.549 42.252,10.549 43.752,10.549 45.252,10.549 46.752,10.549 30.023,10.795 5.105,10.973 31.801,11.278 21.869,11.339 40.945,11.405 35.611,11.608 41.961,11.709 34.138,11.862 29.693,11.963 30.861,11.963 5.309,12.014 32.715,12.012 43.129,12.014 7.002,12.049 8.502,12.049 10.002,12.049 11.502,12.049 13.002,12.049 14.502,12.049 16.002,12.049 17.502,12.049 19.002,12.049 20.502,12.049 44.502,12.049 46.002,12.049 47.502,12.049 24.997,12.827 1.067,12.939 35.983,12.939 34.02,13.056 44.145,13.183 4.343,13.31 42.062,13.36 2.159,13.409 6.35,13.487 40.945,13.513 7.752,13.549 9.252,13.549 10.752,13.549 12.252,13.549 13.752,13.549 15.252,13.549 16.752,13.549 18.252,13.549 19.752,13.549 21.252,13.549 45.252,13.549 46.752,13.549 25.42,13.741 37.465,13.868 3.353,13.968 5.337,13.968 43.137,13.968 1.067,14.783 29.185,14.834 30.299,14.834 31.42,14.834 37.44,15.011 2.502,15.049 4.002,15.049 7.002,15.049 8.502,15.049 10.002,15.049 11.502,15.049 13.002,15.049 14.502,15.049 16.002,15.049 17.502,15.049 19.002,15.049 20.502,15.049 22.002,15.049 23.502,15.049 25.002,15.049 41.502,15.049 44.502,15.049 46.002,15.049 47.502,15.049 25.756,15.316 5.334,15.545 40.894,15.644 0.787,15.884 6.401,15.884 29.566,15.866 43.137,15.884 8.103,15.977 3.2,16.002 10.752,16.549 12.252,16.549 16.752,16.549 18.252,16.549 19.752,16.549 21.252,16.549 40.752,16.549 42.252,16.549 43.752,16.549 45.252,16.549 46.752,16.549 9.601,16.586 29.769,16.84 14.783,16.866 13.183,16.891 20.247,17.348 21.742,17.348 22.657,17.475 31.039,17.729 16.612,17.987 43.129,18.009 19.002,18.049 32.502,18.049 34.002,18.049 35.502,18.049 37.002,18.049 38.502,18.049 40.002,18.049 41.502,18.049 44.502,18.049 46.002,18.049 47.502,18.049 17.805,18.25 31.651,18.542 5.588,18.669 6.68,18.751 8.052,18.999 16.586,19.204 44.502,19.431 18.252,19.549 33.252,19.549 34.752,19.549 36.252,19.549 37.752,19.549 39.252,19.549 40.752,19.549 46.752,19.549 32.207,19.583 21.158,19.634 20.168,19.66 22.403,19.668 43.137,19.668 9.017,19.685 4.75,19.761 5.639,19.787 19.279,19.863 7.061,19.888 45.669,20.244 8.077,20.304 16.612,20.47 44.348,20.752 5.588,20.803 32.487,20.828 17.831,20.853 33.76,20.955 6.579,21.069 35.502,21.049 37.002,21.049 38.502,21.049 40.002,21.049 41.502,21.049 8.992,21.281 7.772,21.298 43.18,21.336 18.847,21.59 34.039,21.969 8.611,22.151 16.752,22.549 18.252,22.549 36.252,22.549 37.752,22.549 39.252,22.549 40.752,22.549 42.252,22.549 34.849,22.832 31.061,23.063 32.741,23.089 13.868,23.216 15.342,23.216 12.548,23.26 43.18,23.393 8.611,23.8 4.002,24.049 16.002,24.049 17.502,24.049 18.898,24.052 32.502,24.049 34.002,24.049 35.502,24.049 37.002,24.049 38.502,24.049 40.002,24.049 41.502,24.049 5.309,24.079 1.448,24.13 2.692,24.16 13.081,24.359 11.532,24.384 14.529,24.46 7.62,24.613 10.316,24.613 9.093,24.714 6.096,24.74 47.269,24.917 31.653,25.07 45.263,25.07 43.84,25.146 16.778,25.169 11.973,25.229 13.665,25.222 19.002,25.324 35.331,25.317 37.214,25.349 41.097,25.4 42.316,25.431 20.549,25.502 1.752,25.549 3.252,25.549 15.252,25.549 33.252,25.549 39.252,25.549 9.017,25.73 6.362,26.268 8.179,26.26 10.321,26.268 12.237,26.268 14.191,26.26 16.321,26.268 18.237,26.268 20.191,26.26 22.321,26.268 24.237,26.268 28.321,26.268 30.237,26.268 32.191,26.26 34.321,26.268 36.237,26.268 38.191,26.26 40.335,26.268 4.623,26.289 43.866,26.34 26.238,26.365 45.466,26.365 47.269,26.365
  other v2: 27.554,19.548 28.654,19.548 29.754,19.548 27.554,20.648 28.654,20.648 29.754,20.648 27.554,21.748 28.654,21.748 29.754,21.748
NetC8_2: C8.2 C9.1 C13.2 C14.1 FB1.2 L1.2 | length 5.4
  Top Layer w0.508: C9.1 25.022,7.719 25.987,8.685 FB1.2
  Top Layer w0.991: C14.1 C13.2 C8.2 C9.1
NetC10_2: C10.2 C11.1 C15.2 C16.1 FB2.2 L2.2 | length 5.2
  Top Layer w0.508: C15.2 38.357,8.126 38.611,8.38 38.611,8.462 38.897,8.748 38.979,8.748 FB2.2
  Top Layer w1.016: C10.2 C11.1 C16.1 C15.2
NetC19_1: C19.1 D1.1 J1.1 L4.2 | length 5.3
  Top Layer w1.016: J1.1@3.299,5.027 L4.2 C19.1@8.588,5.027
NetC19_2: C19.2 U1.2 | length 0.7
  Top Layer w1.016: C19.2@10.316,5.027 U1.2@11.027,5.027
NetC20_1: C20.1 U1.5 | length 0.7
  Top Layer w1.016: U1.5@13.694,5.078 C20.1@14.405,5.078
NetC20_2: C20.2 U3.1
NetC21_1: C21.1 L1.1 U3.3 | length 1.3
  Top Layer w1.016: U3.3@19.968,5.256 L1.1
NetC21_2: C21.2 U2.2 | length 1
  Top Layer w1.016: C21.2@23.778,5.256 U2.2
NetC22_1: C22.1 U2.5 | length 0.5
  Top Layer w1.016: U2.5@27.334,5.23 C22.1@27.842,5.23
NetC22_2: C22.2 U4.1
NetC23_1: C23.1 L2.1 U4.3 | length 1.3
  Top Layer w1.016: U4.3@33.48,5.637 L2.1
NetC23_2: C23.2 D2.1 J2.1 L3.1 L5.2 | length 7.7
  Top Layer w1.016: L3.1 L5.2 41.924,5.637 cw(c41.924,5.297) 42.164,5.537 ccw(c42.495,5.868) 42.495,5.4 J2.1
NetC24_1: C24.1 C25.1 D3.1 T1.1 | length 6
  Top Layer w1.27: D3.1@10.211,22.962 10.975,22.962 10.975,21.538 12.014,21.538 ; 11.763,21.789 12.014,21.538 ; T1.1 12.014,21.538
NetC24_2: C24.2 C25.2 C31.2 FB5.1 T1.2 | length 11.5
  Top Layer w0.762: C31.2@3.48,18.921 4.597,17.803 FB5.1
  Top Layer w1.016: FB5.1 7.36,17.323 ccw(c7.36,19.863) 9.156,18.067 cw(c10.294,16.928) C24.2@10.294,18.538
  Top Layer w1.27: C24.2@11.025,18.538 T1.2
NetC26_1: C26.1 C27.1 FB3.2 U5.13 U5.15 U5.16 | length 5.5
  Top Layer w0.203: 26.8,23.493 26.8,24.991 27.003,25.195 28.518,25.195 28.667,25.046 28.667,23.061 U5.13
NetC30_1: C30.1 U5.14 | length 1.3
  Top Layer w0.356: U5.14 C30.1@28.004,24.346
NetC31_1: C31.1 D3.2 FB4.2 | length 4.3
  Top Layer w1.016: C31.1 4.597,21.793 ; FB4.2 5.901,22.428 ccw(c5.901,24.249) D3.2
NetFB4_1: FB4.1 P1.1 P1.2 TVS1.1 | length 5.6
  Top Layer w1.016: P1.1@1.27,22.428 FB4.1
  Top Layer w1.5: P1.2@1.27,20.125 P1.1@1.27,22.428
  Bottom Layer w1.016: P1.2@1.477,19.918 ccw(c2.162,20.603) 2.162,19.634 TVS1.1
NetFB5_2: FB5.2 P1.3 TVS1.2 | length 3
  Top Layer w1.016: P1.3@1.321,17.323 FB5.2
  Bottom Layer w1.27: P1.3@1.76,17.661 cw(c2.845,16.576) TVS1.2
NetNT1_2: NT1.2 U5.10 | length 1.1
  Top Layer w0.254: U5.10@31.075,21.969 NT1.2
NetR1_1: R1.1 T1.4 | length 1.8
  Top Layer w1.016: T1.4@20.349,22.222 R1.1
Vin: C7.2 C12.1 C17.2 C18.1 FB3.1 L3.2 R1.2 | length 5.8
  Top Layer w0.762: C7.2@35.507,2.766 35.507,2.812 36.782,4.087 C17.2
  Top Layer w0.94: C17.2@36.922,4.087 L3.2
  Top Layer w1.016: R1.2 FB3.1 ; C18.1 C12.1
pads on no net: U5.2 U5.4 U5.5 U5.8 U5.9 U5.11 U5.12 U5.17 U5.18 U5.19

## Polygon pours and split planes (outlines as drawn)
GND on Top Layer "Top Layer-No Net" (solid, pour order 0): 0,27.4 48.2,27.4 48.2,0 0,0
GND on Bottom Layer "Bottom Layer-GND" (solid, pour order 2): 0,27.4 48.2,27.4 48.2,0 0,0

## Other copper
Top Layer:
  rectangle net Vin: 21.39,24.509 23.498,25.118
  rectangle net +5V: 26.597,17.143 27.511,18.616
  rectangle net +5V: 25.81,16.254 26.699,19.454
  rectangle net NetC26_1: 25.098,21.791 26.635,22.858
  rectangle net NetC26_1: 24.019,22.655 27.537,23.696
  rectangle net GND: 40.745,3.579 41.71,4.595
  rectangle net GND: 40.643,2.335 41.71,3.351
  pour cut-out: 9.401,20.726 10.399,20.664 10.399,20.317 10.351,20.269 10.326,20.295 9.401,19.401
  pour cut-out: 23.143,20.826 22.634,20.826 22.606,20.853 22.631,20.879 22.631,21.538 23.245,21.538 23.295,21.488
  pour cut-out: 13.157,20.803 13.202,20.757 16.19,20.757 16.19,19.253 16.205,19.238
  pour cut-out: 11.622,6.278 11.622,5.478 11.222,5.078 11.222,3.878 13.422,3.878 13.422,6.278
  pour cut-out: 25.16,6.456 26.96,6.456 26.96,4.056 24.76,4.056

## Silkscreen, mask and mechanical layers (free items; w line width, h text height)
Top Overlay:
  region: 15.011,13.487 14.656,12.37 10.338,13.284 14.503,11.76 14.249,10.693 15.367,10.338 14.503,5.918 16.027,10.795 14.961,11.049 15.367,12.827 17.094,12.421 16.84,11.201 21.768,10.185 17.551,11.608 17.805,12.776 16.688,13.081 17.551,17.501 16.129,13.233
  pour cut-out: 4.191,18.25
  lines w0.254: 1.477,19.787 2.997,19.787 2.997,22.458 1.477,22.458
  text "+" at 4.002,24.049 h7.62 r90
  text "-" at 3.302,13.792 h7.62 r90
Bottom Overlay:
  region: 10.744,15.85 10.389,14.732 6.071,15.646 10.236,14.122 9.982,13.056 11.1,12.7 10.236,8.28 11.76,13.157 10.693,13.411 11.1,15.189 12.827,14.783 12.573,13.564 17.501,12.548 13.284,13.97 13.538,15.138 12.421,15.443 13.284,19.863 11.862,15.596
  lines w0.254: 1.448,19.782 2.087,20.422 2.968,20.422 2.968,22.454 1.448,22.454
  text "+" at 6.375,22.682 h12.7 r90
  text "6-12 V" at 5.817,22.479 h2.54 r90
  text "PW-Sat2" at 42.164,20.142 h10.16
  text "X 2018" at 43.561,14.376 h5.08
  text "-" at 5.944,13.335 h12.7 r90
  text "-" at 29.947,6.274 h12.7 r180
  text "+" at 30.251,4.953 h10.16 r90
  text "4" at 25.603,3.277 h10.16
  text "MHz" at 19.279,3.099 h10.16
  text "433" at 43.967,2.997 h10.16
Top Solder:
  rectangle: 10.566,4.724 10.922,5.41
  rectangle: 13.691,4.75 14.021,5.41
  rectangle: 40.259,3.023 41.351,3.835
  rectangle: 38.76,3.15 39.802,3.759
  rectangle: 37.44,3.579 37.795,4.623
  rectangle: 24.003,4.902 24.511,5.588
  rectangle: 27.153,4.902 27.762,5.588
  rectangle: 25.273,8.712 25.451,9.449
  rectangle: 21.641,7.188 24.638,8.255
  rectangle: 21.768,8.712 24.968,9.754
  rectangle: 12.903,18.771 13.259,19.304
  rectangle: 13.081,20.726 13.411,21.361
  rectangle: 24.917,24.562 25.044,24.841
  rectangle: 31.318,21.742 32.08,22.174
  rectangle: 37.44,12.167 38.506,12.37
  rectangle: 38.303,13.31 38.506,13.589
  rectangle: 38.964,13.259 40.03,13.538
  rectangle: 38.964,12.167 40.03,12.344
  rectangle: 38.837,9.119 38.964,9.804
  rectangle: 38.837,8.636 38.964,8.738
  rectangle: 35.154,7.595 37.821,8.661
  rectangle: 35.331,9.119 38.837,10.185
  rectangle: 22.2,23.495 22.581,24.46
  rectangle: 21.39,24.382 23.498,25.118
  region: 25.324,8.001 25.651,8.328 cw(c25.781,8.198) 25.781,8.382 25.451,8.712 24.968,8.712 24.968,8.001
  region: 38.71,8.534 38.697,9.22 39.294,9.269 39.294,8.534
  region: 38.71,10.185 38.71,10.465 39.141,10.465 39.141,9.779 38.684,9.779
  region: 25.273,9.449 25.908,9.449 25.908,10.16 25.273,10.16
  lines w0.381: 43.307,20.828 43.383,20.828 43.866,21.311
Bottom Solder:
  rectangle: 1.905,17.577 2.362,17.856
  rectangle: 1.346,19.152 2.413,20.168
Mechanical 1:
  the board outline again, w0.381

## Text inside footprints (layer, text, board x,y; h text height)
C1: Mechanical 17 "d" at 27.105,13.536 h0.38 r180; Mechanical 19 "-" at 27.105,13.536 h0.38 r180
C2: Mechanical 17 "d" at 39.119,14.552 h0.38 r180; Mechanical 19 "-" at 39.119,14.552 h0.38 r180
C3: Mechanical 17 "d" at 23.828,11.275 h0.25; Mechanical 19 "-" at 23.828,11.275 h0.25
C4: Mechanical 17 "d" at 26.292,11.275 h0.25; Mechanical 19 "-" at 26.292,11.275 h0.25
C5: Mechanical 17 "d" at 37.849,11.529 h0.25; Mechanical 19 "-" at 37.849,11.529 h0.25
C6: Mechanical 17 "d" at 39.627,12.952 h0.25 r180; Mechanical 19 "-" at 39.627,12.952 h0.25 r180
C7: Mechanical 17 "d" at 31.699,2.642 h0.38; Mechanical 19 "-" at 31.699,2.642 h0.38
C8: Mechanical 17 "d" at 23.473,9.37 h0.25 r270; Mechanical 19 "-" at 23.473,9.37 h0.25 r270
C9: Mechanical 17 "d" at 24.895,7.592 h0.25 r90; Mechanical 19 "-" at 24.895,7.592 h0.25 r90
C10: Mechanical 17 "d" at 34.649,9.777 h0.25 r270; Mechanical 19 "-" at 34.649,9.777 h0.25 r270
C11: Mechanical 17 "d" at 36.071,7.999 h0.25 r90; Mechanical 19 "-" at 36.071,7.999 h0.25 r90
C12: Mechanical 17 "d" at 39.145,3.96 h0.25; Mechanical 19 "-" at 39.145,3.96 h0.25
C13: Mechanical 17 "d" at 22.304,9.37 h0.25 r270; Mechanical 19 "-" at 22.304,9.37 h0.25 r270
C14: Mechanical 17 "d" at 21.39,7.592 h0.25 r90; Mechanical 19 "-" at 21.39,7.592 h0.25 r90
C15: Mechanical 17 "d" at 38.154,9.777 h0.25 r270; Mechanical 19 "-" at 38.154,9.777 h0.25 r270
C16: Mechanical 17 "d" at 37.24,7.999 h0.25 r90; Mechanical 19 "-" at 37.24,7.999 h0.25 r90
C17: Mechanical 17 "d" at 37.189,2.436 h0.25 r90; Mechanical 19 "-" at 37.189,2.436 h0.25 r90
C18: Mechanical 17 "d" at 39.145,2.716 h0.25; Mechanical 19 "-" at 39.145,2.716 h0.25
C19: Mechanical 17 "d" at 8.563,4.9 h0.25; Mechanical 19 "-" at 8.563,4.9 h0.25
C20: Mechanical 17 "d" at 14.303,4.951 h0.25; Mechanical 19 "-" at 14.303,4.951 h0.25
C21: Mechanical 17 "d" at 22.101,5.129 h0.25; Mechanical 19 "-" at 22.101,5.129 h0.25
C22: Mechanical 17 "d" at 27.842,5.106 h0.25; Mechanical 19 "-" at 27.842,5.106 h0.25
C23: Mechanical 17 "d" at 35.639,5.51 h0.25; Mechanical 19 "-" at 35.639,5.51 h0.25
C24: Mechanical 17 "d" at 10.671,21.664 h0.38 r270; Mechanical 19 "-" at 10.671,21.664 h0.38 r270
C25: Mechanical 17 "d" at 12.424,20.953 h0.25 r270; Mechanical 19 "-" at 12.424,20.953 h0.25 r270
C26: Mechanical 17 "d" at 24.413,22.096 h0.38 r270; Mechanical 19 "-" at 24.413,22.096 h0.38 r270
C27: Mechanical 17 "d" at 25.606,23.62 h0.25 r90; Mechanical 19 "-" at 25.606,23.62 h0.25 r90
C28: Mechanical 17 "d" at 26.013,16.889 h0.25 r180; Mechanical 19 "-" at 26.013,16.889 h0.25 r180
C29: Mechanical 17 "d" at 27.537,16.254 h0.38; Mechanical 19 "-" at 27.537,16.254 h0.38
C30: Mechanical 17 "d" at 27.791,24.306 h0.25; Mechanical 19 "-" at 27.791,24.306 h0.25
C31: Mechanical 17 "d" at 3.353,20.803 h0.25 r270; Mechanical 19 "-" at 3.353,20.803 h0.25 r270
D1: Mechanical 17 "d" at 6.633,5.327 h0.25 r90; Mechanical 19 "-" at 6.633,5.353 h0.25 r90
D2: Mechanical 17 "d" at 41.939,5.949 h0.25 r90; Mechanical 19 "-" at 41.939,5.974 h0.25 r90
D3: Mechanical 17 "d" at 10.112,23.47 h0.38 r180; Mechanical 19 "-" at 10.112,23.47 h0.38 r180
FB1: Mechanical 17 "d" at 26.114,10.437 h0.25 r270; Mechanical 19 "-" at 25.606,10.437 h0.25 r270
FB2: Mechanical 17 "d" at 39.627,10.793 h0.25 r270; Mechanical 19 "-" at 39.119,10.793 h0.25 r270
FB3: Mechanical 17 "d" at 22.99,24.179 h0.25; Mechanical 19 "-" at 22.99,23.671 h0.25
FB4: Mechanical 17 "d" at 3.073,22.555 h0.25; Mechanical 19 "-" at 3.073,22.047 h0.25
FB5: Mechanical 17 "d" at 4.597,17.196 h0.25 r180; Mechanical 19 "-" at 4.597,17.704 h0.25 r180
J1: Mechanical 17 "d" at -8.992,4.45 h1.52; Mechanical 19 "-" at -8.992,4.45 h1.52
J2: Mechanical 17 "d" at 57.225,5.875 h1.52 r180; Mechanical 19 "-" at 57.225,5.875 h1.52 r180
L1: Mechanical 17 "d" at 21.644,5.002 h0.25 r90; Mechanical 19 "-" at 21.644,5.002 h0.25 r90
L2: Mechanical 17 "d" at 35.157,5.383 h0.25 r90; Mechanical 19 "-" at 35.157,5.383 h0.25 r90
L3: Mechanical 17 "d" at 37.9,5.891 h0.25 r270; Mechanical 19 "-" at 37.9,5.891 h0.25 r270
L4: Mechanical 17 "d" at 7.344,6.805 h0.25 r270; Mechanical 19 "-" at 7.344,6.805 h0.25 r270
L5: Mechanical 17 "d" at 39.17,7.415 h0.25 r270; Mechanical 19 "-" at 39.17,7.415 h0.25 r270
NT1: Mechanical 17 "d" at 35.792,22.223 h0.51 r180; Mechanical 19 "-" at 34.903,22.223 h0.51 r180
P1: Mechanical 17 "d" at 0.508,23.597 h1.52 r270; Mechanical 19 "-" at 0.508,23.597 h1.52 r270
R1: Mechanical 17 "d" at 20.349,24.179 h0.25; Mechanical 19 "-" at 20.349,23.671 h0.25
SHIELD1: Mechanical 17 "d" at 51.003,80.874 h1.52 r180; Mechanical 19 "-" at 51.003,80.62 h1.52 r180
SHIELD2: Mechanical 17 "d" at 23.424,13.155 h1.52; Mechanical 19 "-" at 23.424,13.409 h1.52
T1: Mechanical 17 "d" at 17.605,19.911 h0.3; Mechanical 19 "-" at 17.631,19.886 h0.3
TVS1: Mechanical 17 "d" at 2.718,19.634 h0.25 r90; Mechanical 19 "-" at 3.226,19.634 h0.25 r90
U1: Mechanical 17 "d" at 12.195,6.602 h0.51 r270; Mechanical 19 "-" at 12.195,6.602 h0.51 r270
U2: Mechanical 17 "d" at 25.733,6.78 h0.51 r270; Mechanical 19 "-" at 25.733,6.78 h0.51 r270
U3: Mechanical 17 "d" at 17.732,6.806 h0.64; Mechanical 19 "-" at 17.732,6.806 h0.64
U4: Mechanical 17 "d" at 31.245,7.033 h0.64; Mechanical 19 "-" at 31.245,7.033 h0.64
U5: Mechanical 17 "d" at 29.035,18.362 h0.64 r90; Mechanical 19 "-" at 29.035,18.362 h0.64 r90